# Allegro board Compressor Monitor.brd
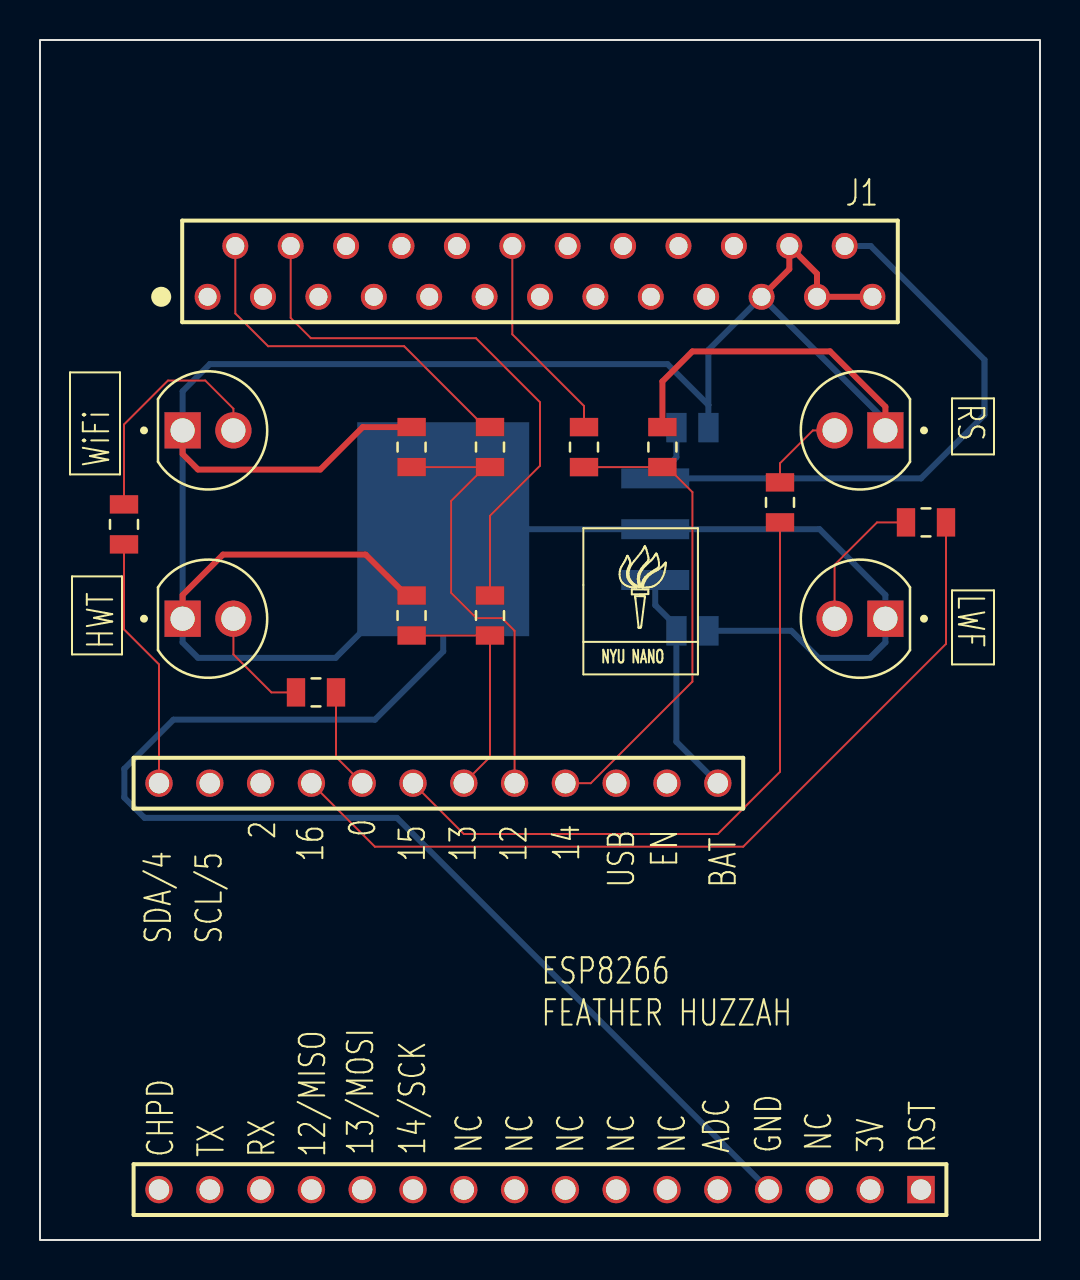
[diagram p0: board, top side]
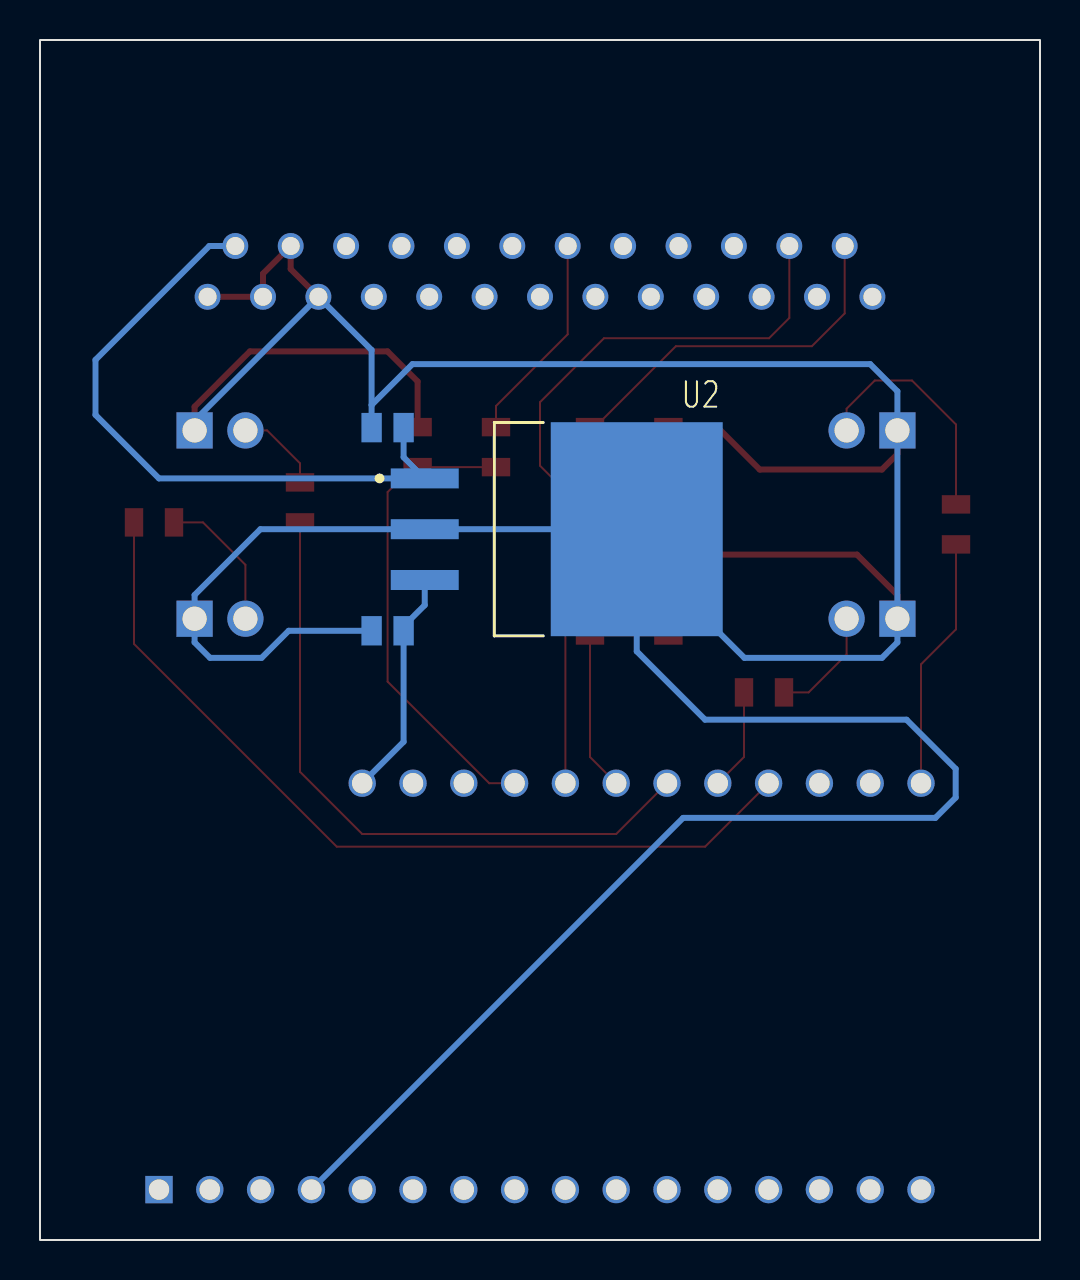
[diagram p1: board, bottom side, seen from below]

Outline 50 x 60 mm; copper layers: TOP, BOTTOM. Coordinates in mm from the lower left corner of the outline.
Outline path: rectangle 0,0 50,60

## Design rules (mm)
constraint set DEFAULT: min track width 0.1
nets with their own width: min track width 0.3; nets 5V 24V GND_POWER

## Placement (name value [footprint] x y rotation side)
C1  0.33u  [CAP0805]  32.62 40.62 180 bottom
C2  0.1u  [CAP0805]  32.62 30.46 180 bottom
D1  L08R5000Q1  [LEDRD254W57D500H1070]  8.4 40.48 0 top
D2  L08R5000Q1  [LEDRD254W57D500H1070]  8.4 31.07 0 top
D3  L08R5000Q1  [LEDRD254W57D500H1070]  41 31.07 180 top
D4  L08R5000Q1  [LEDRD254W57D500H1070]  41 40.48 180 top
J1  -  [L717DFB25P1AON]  41.62 47.16 180 top
NOREF  -  []  27.1 27.28 0 top
NOREF#2  -  []  0 60 0 top
NOREF#3  -  []  50 0 90 top
NOREF#4  -  []  -71.9 -90.82 0 top
R1  10k  [RES0805]  31.12 39.64 270 top
R2  100k  [RES0805]  27.2 39.64 90 top
R3  10k  [RES0805]  18.58 39.64 270 top
R4  100k  [RES0805]  22.5 39.64 90 top
R5  10k  [RES0805]  18.58 31.23 270 top
R6  100k  [RES0805]  22.5 31.23 90 top
R7  10k  [RES0805]  4.2 35.78 90 top
R8  10k  [RES0805]  13.8 27.38 180 top
R9  10k  [RES0805]  44.3 35.88 180 top
R10  10k  [RES0805]  37 36.88 90 top
U1  -  [ESP8266]  25 12.68 0 top
U2  UA7805KTT  [KTT0003A-MFG]  22.46 35.54 270 bottom

## Library data of the parts
C1 C2 = C
D1-D4 = L08R5000Q1
J1 = L717DFB25P1AON
R1-R10 = R
U1 = ESP8266
U2 = UA7805CKTTRG3

## Footprints (pads in the part's own frame, mm; a bottom-side part is the same pattern mirrored in y, then rotated)
CAP0805
  rect 1.02x1.47 smd: 1(-0.8,0) 2(0.8,0)
ESP8266
  rect 1.37x1.37 hole 1.02: 1(19.05,-10.16)
  round 1.37 hole 1.02: 2(16.51,-10.16) 3(13.97,-10.16) 4(11.43,-10.16) 5(8.89,-10.16) 6(6.35,-10.16) 7(3.81,-10.16) 8(1.27,-10.16) 9(-1.27,-10.16) 10(-3.81,-10.16) 11(-6.35,-10.16) 12(-8.89,-10.16) 13(-11.43,-10.16) 14(-13.97,-10.16) 15(-16.51,-10.16) 16(-19.05,-10.16) 17(-19.05,10.16) 18(-16.51,10.16) 19(-13.97,10.16) 20(-11.43,10.16) 21(-8.89,10.16) 22(-6.35,10.16) 23(-3.81,10.16) 24(-1.27,10.16) 25(1.27,10.16) 26(3.81,10.16) 27(6.35,10.16) 28(8.89,10.16)
KTT0003A-MFG
  rect 1x3.4 smd: 1(-2.54,-8.303) 2(0,-8.303) 3(2.54,-8.303)
  rect 10.7x8.6 smd: 4(0,2.297)
L717DFB25P1AON
  round 1.3 hole 0.9: 1(33.24,0) 2(30.47,0) 3(27.7,0) 4(24.93,0) 5(22.16,0) 6(19.39,0) 7(16.62,0) 8(13.85,0) 9(11.08,0) 10(8.31,0) 11(5.54,0) 12(2.77,0) 13(0,0) 14(31.855,-2.54) 15(29.085,-2.54) 16(26.315,-2.54) 17(23.545,-2.54) 18(20.775,-2.54) 19(18.005,-2.54) 20(15.235,-2.54) 21(12.465,-2.54) 22(9.695,-2.54) 23(6.925,-2.54) 24(4.155,-2.54) 25(1.385,-2.54)
LEDRD254W57D500H1070
  round 1.815 hole 1.21: A(1.27,0)
  rect 1.815x1.815 hole 1.21: C(-1.27,0)
RES0805
  rect 0.92x1.42 smd: 1(-1,0) 2(1,0)

## Nets
5V: C2.2 U1.28 U2.3(OUTPUT)
24V: C1.2 J1.25 U2.1
GND_POWER: C1.1 C2.1 D1.C D2.C D3.C D4.C J1.11 J1.12 J1.13 J1.24 R1.1 R3.1 R5.1 U1.4 U2.2 U2.4
DB25_HWT: J1.14 R4.2
DB25_LWF: J1.15 R6.2
DB25_RS: J1.19 R2.2
LED_HWT: R8.1 U1.21
LED_LWF: R9.1 U1.20
LED_RS: R10.1 U1.22
LED_WIFI: R7.1 U1.17
PIN_HWT: R3.2 R4.1 U1.24
PIN_LWF: R5.2 R6.1 U1.23
PIN_RS: R1.2 R2.1 U1.25
N04392: D3.A R9.2
N04451: D1.A R7.2
N04516: D4.A R10.2
N025160: D2.A R8.2

Pads without a net: J1 1 2 3 4 5 6 7 8 9 10 16 17 18 20 21 22 23; U1 1 2 3 5 6 7 8 9 10 11 12 13 14 15 16 18 19 26 27

## Routing (per net, layer and track width the routed paths; a pad name or vN(x,y) marks a point on that pad's centre or on a via; arc(x,y) is an arc through that point)
5V: length 11.5
  BOTTOM w0.3: U1.28 31.82,24.91 C2.2 31.82,30.68 30.76,31.74 U2.3
24V: length 32.9
  BOTTOM w0.3: J1.25 41.53,49.7 47.23,44.01 47.23,41.25 44.05,38.08 U2.1 31.82,39.14 C1.2
GND_POWER: length 228.1
  TOP w0.3: D1.C 7.13,39.3 7.9,38.52 14.01,38.52 16.14,40.64 R3.1 ; J1.13 J1.12 38.85,48.31 J1.24 37.47,48.55 J1.11 ; R1.1 31.12,42.93 32.62,44.43 39.5,44.43 42.27,41.66 D4.C ; R5.1 18.33,32.23 16.29,34.27 9.15,34.27 7.13,32.25 D2.C
  BOTTOM w0.3: 20.16,34.49 20.16,29.43 16.74,26.02 6.67,26.02 4.21,23.56 4.21,22.12 5.23,21.11 17.84,21.11 U1.4 ; 20.16,34.49 U2.4 U2.2 38.98,35.54 42.27,32.25 D3.C 42.27,29.88 41.5,29.11 38.92,29.11 37.57,30.46 C2.1 ; 20.16,34.49 14.78,29.11 7.9,29.11 7.13,29.88 D2.C D1.C 7.13,42.44 8.49,43.8 31.38,43.8 33.42,41.75 ; D4.C 42.27,40.97 J1.11 33.42,44.5 33.42,41.75 ; 33.42,41.75 C1.1
DB25_HWT: length 18.5
  TOP w0.1: J1.14 9.77,46.33 11.41,44.69 18.21,44.69 22.25,40.64 R4.2
DB25_LWF: length 28.5
  TOP w0.1: J1.15 12.54,46.1 13.55,45.09 21.8,45.09 25,41.89 25,38.72 22.5,36.22 R6.2
DB25_RS: length 10.5
  TOP w0.1: R2.2 27.2,41.7 23.61,45.28 J1.19
LED_HWT: length 5.1
  TOP w0.1: U1.21 14.8,24.15 R8.1
LED_LWF: length 43.3
  TOP w0.1: R9.1 45.3,29.8 35.16,19.66 16.74,19.66 U1.20
LED_RS: length 33.2
  TOP w0.1: R10.1 37,23.41 33.89,20.3 21.19,20.3 U1.22
LED_WIFI: length 12.7
  TOP w0.1: U1.17 5.95,28.78 4.2,30.53 R7.1
PIN_HWT: length 22.5
  TOP w0.1: 22.25,38.64 20.55,36.95 20.55,32.36 21.82,31.09 23.09,31.09 23.73,30.46 U1.24 ; 22.25,38.64 R3.2 ; 22.25,38.64 R4.1
PIN_LWF: length 11.8
  TOP w0.1: R5.2 R6.1 22.5,24.15 U1.23
PIN_RS: length 23.9
  TOP w0.1: U1.25 27.54,22.84 32.62,27.92 32.62,37.39 31.37,38.64 R1.2 R2.1
N04392: length 7.1
  TOP w0.1: D3.A 39.73,33.76 41.85,35.88 R9.2
N04451: length 12
  TOP w0.1: R7.2 4.2,40.77 6.4,42.97 8.26,42.97 9.67,41.56 D1.A
N04516: length 4.4
  TOP w0.1: R10.2 37,38.83 38.65,40.48 D4.A
N025160: length 5.7
  TOP w0.1: D2.A 9.67,29.28 11.57,27.38 R8.2

## Text on the board
Ref Des/Silkscreen Bottom: U2
Ref Des/Silkscreen Top: NYU NANO | ESP8266 | FEATHER HUZZAH | J1 | WiFi | HWT | RS | LWF
XSECTION_CHART: *  SURFACE | L1 TOP CONDUCTOR | *  DIELECTRIC | L2 BOTTOM CONDUCTOR | DESIGN CROSS SECTION CHART | ___________________________ | TOTAL THICKNESS 1.67 MM | 1-2 | FIGURE | FINISHED_SIZE | 0.9 | 1.02 | 1.21 | DRILL CHART: TOP to BOTTOM | ALL UNITS ARE IN MILLIMETERS | PLATED | QTY | 25 | 28 | 8
